# EAGLE board Main Board _Board (EAGLE 9.7.0), part 1 of 3
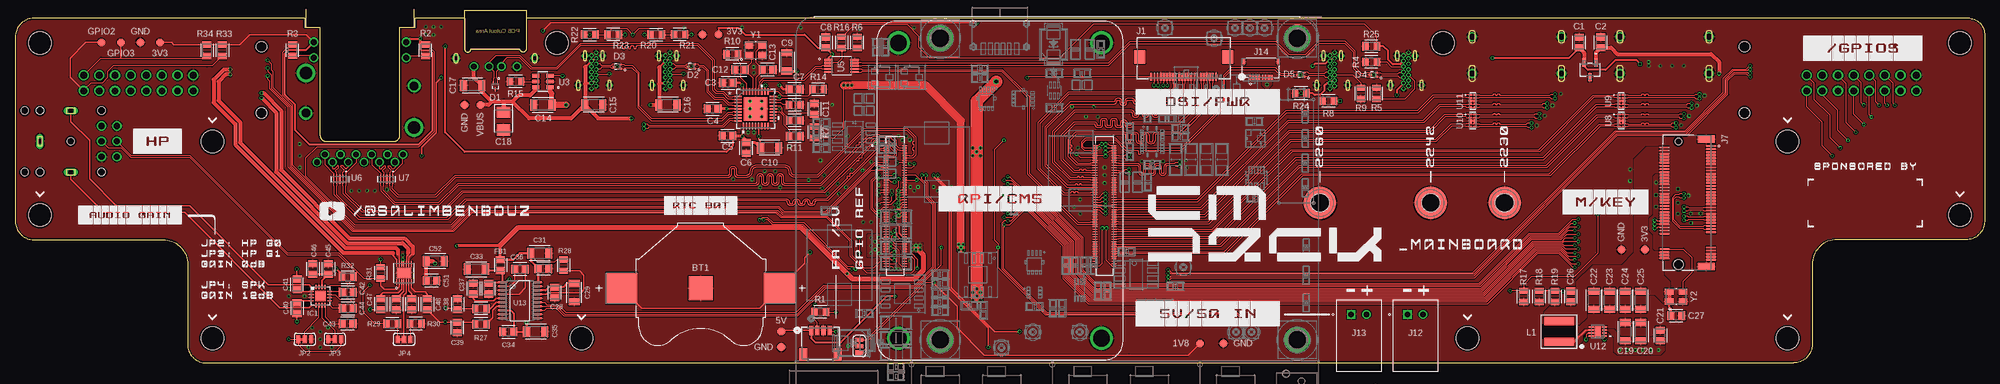
[diagram p0: board, top side]
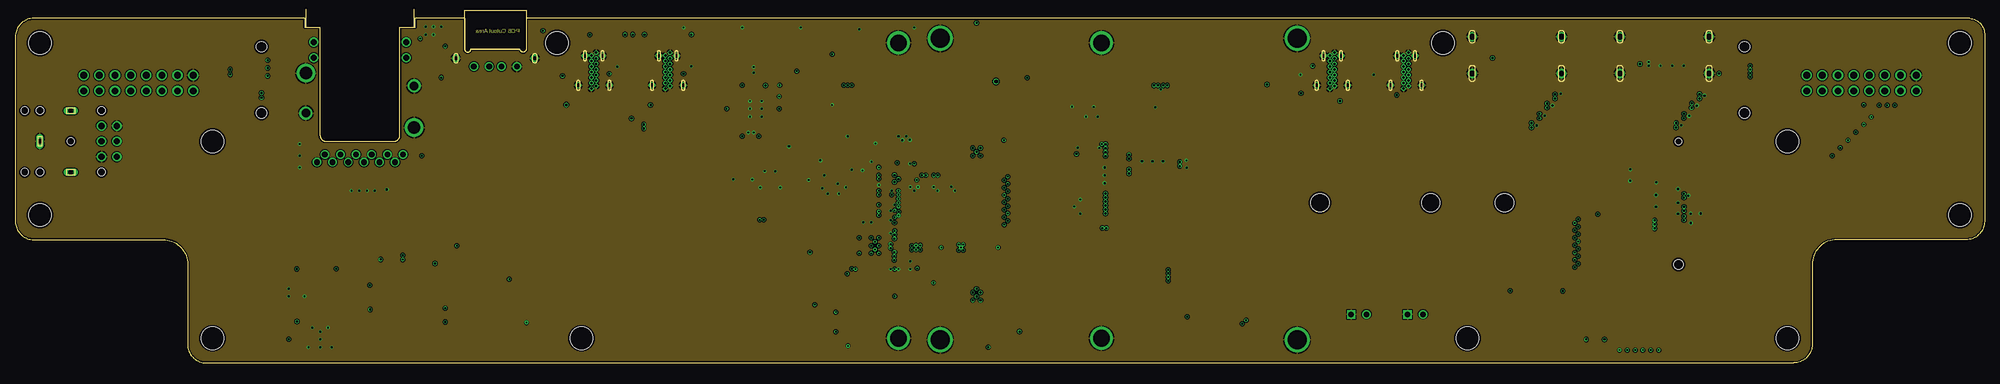
[diagram p1: board, inner layer Route2]
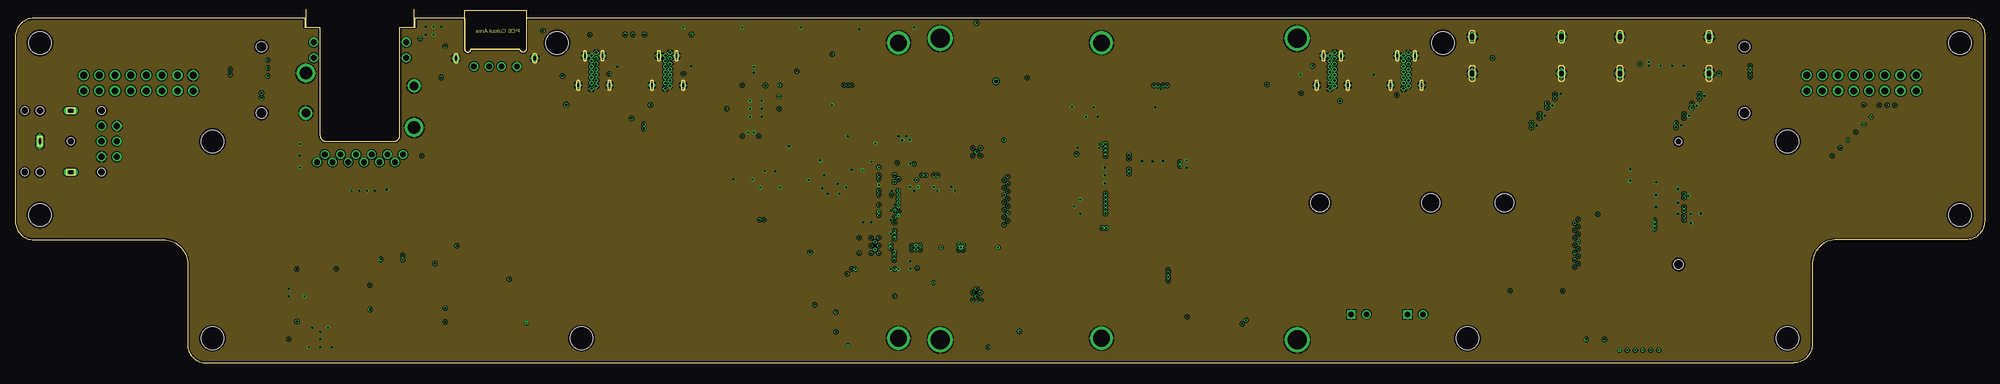
[diagram p2: board, inner layer Route15]
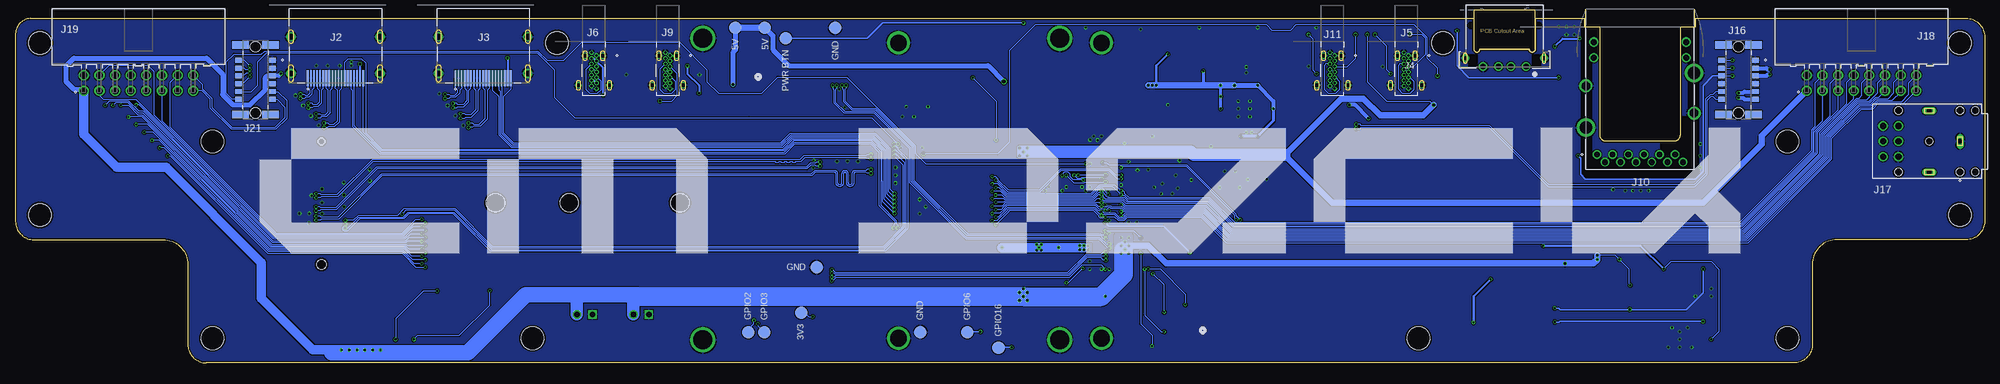
[diagram p3: board, bottom side, seen from below]

Size 320.02 x 56 mm. Coordinates in mm from the lower left corner, seen from the top.
Outline: 3,56 arc90 0,53 0,23 arc90 3,20 24,20 arc-90 28,16 28,3 arc90 31,0 289,0 arc90 292,3 292,16 arc-90 296,20 317,20 arc90 320,23 320,53 arc90 317.63,56 83,56 83,50.98 arc-180 82.03,50.98 74,50.98 arc-180 73.03,50.98 73.03,56 65,56 65,54.5 62.5,54.5 62.5,37 arc-90 61.5,36 50.5,36 arc-90 49.5,37 49.5,54.5 47,54.5 47,56 3,56
Copper layers (1+2*15+16): Top 0.035mm / dielectric 0.11mm / Route2 0.035mm / dielectric 1.2mm / Route15 0.035mm / dielectric 0.11mm / Bottom 0.035mm
Design rules "PCBWay_4L_100um-Track *": minimum track width 0.1mm, minimum drill 0.3mm, track to track 0.1mm, track to pad 0.1mm, pad to pad 0.1mm, via to via 0.1mm, smd to smd 0mil, copper to edge 0.3mm, drill to drill 10mil, minimum pad ring 6mil, minimum via ring 0.1mm, stop-mask expansion 2mil, vias tented up to drill 999mil, thermal gap 0.2mm
Net classes: 1 Audio: width 0.203 mm, clearance 0.178 mm; 2 100 ohm: width 0.178 mm, clearance 0.152 mm; 3 90 ohm: width 0.191 mm, clearance 0.105 mm
Holes 3.7 mm at 32,36 32,4 288,4 288,36 236,4 92,4 4,24 316,24 4,52 316,52 88,52 232,52

## Footprints (pad centres in the part's own frame; a part is rotated, then mirrored left to right if it is on the bottom)
BAT_3002 = smd 3.96 x 3.96: N 0,0 | smd 5.08 x 5.08: P 12.825,0; P1 -12.825,0
CAPC2012X110 = smd 1.165 x 1.465: 1 -0.875,0; 2 0.875,0
CAPC3216X135 = smd 1.165 x 1.815: 1 -1.475,0; 2 1.475,0
CAPMP3528X210N = smd 1.796 x 2.204: 1 -1.46,0; 2 1.46,0
SOTFL35P100X50-3N = smd 0.46 x 0.2: 1 -0.52,0.35; 2 -0.52,-0.35; 3 0.52,0
BEADC2012X105N = smd 1.165 x 1.465: 1 -0.875,0; 2 0.875,0
QFN16 = smd 0.85 x 0.3: 1 -1.475,0.75; 2 -1.475,0.25; 3 -1.475,-0.25; 4 -1.475,-0.75; 9 1.475,-0.75; 10 1.475,-0.25; 11 1.475,0.25; 12 1.475,0.75 | smd 0.3 x 0.85: 5 -0.75,-1.475; 6 -0.25,-1.475; 7 0.25,-1.475; 8 0.75,-1.475; 13 0.75,1.475; 14 0.25,1.475; 15 -0.25,1.475; 16 -0.75,1.475 | smd 1.7 x 1.7: TH 0,0
CONN_FH12-22S-0.5SH(55)_HIR = smd 0.305 x 1.295: 1 -5.25,3.05; 2 -4.75,3.05; 3 -4.25,3.05; 4 -3.75,3.05; 5 -3.25,3.05; 6 -2.75,3.05; 7 -2.25,3.05; 8 -1.75,3.05; 9 -1.25,3.05; 10 -0.75,3.05; 11 -0.25,3.05; 12 0.25,3.05; 13 0.75,3.05; 14 1.25,3.05; 15 1.75,3.05; 16 2.25,3.05; 17 2.75,3.05; 18 3.25,3.05; 19 3.75,3.05; 20 4.25,3.05; 21 4.75,3.05; 22 5.25,3.05 | smd 1.803 x 2.21: 23 -7.15,-0.2; 24 7.15,-0.2
SAMESKY_HD05-19-TH-TR = smd 0.28 x 2.6: 1 4.5,6.72; 2 4,6.72; 3 3.5,6.72; 4 3,6.72; 5 2.5,6.72; 6 2,6.72; 7 1.5,6.72; 8 1,6.72; 9 0.5,6.72; 10 0,6.72; 11 -0.5,6.72; 12 -1,6.72; 13 -1.5,6.72; 14 -2,6.72; 15 -2.5,6.72; 16 -3,6.72; 17 -3.5,6.72; 18 -4,6.72; 19 -4.5,6.72 | drill 0.914 pad 1.524 slot 2.718 rotated 90: SH1 -7.25,5.96; SH2 7.25,5.96 | drill 0.914 pad 1.524 slot 2.108 rotated 90: SH3 -7.25,0; SH4 7.25,0
614104190121 = drill 0.92: 1 -3.5,4.85; 2 -1,4.85; 3 1,4.85; 4 3.5,4.85 | drill 0.635 pad 1.219 slot 1.626 rotated 90: S1 -6.4,3.5; S2 6.4,3.5
SAMESKY_UJ20-C-R-G-TH-2-P14-TR = drill 0.406 pad 0.61: A1 -0.39,-2.45; A4 -0.39,-1.55; A5 -0.39,-0.65; A6 -0.39,0.25; A7 -0.39,1.15; A9 -0.39,2.05; A12 -0.39,2.95; B1 0.39,2.5; B4 0.39,1.6; B5 0.39,0.7; B6 0.39,-0.2; B7 0.39,-1.1; B9 0.39,-2; B12 0.39,-2.9 | drill 0.61 pad 1.016 slot 1.626 rotated 90: SH1 -2.53,2.4; SH2 -1.43,-2.4; SH3 2.53,2.4; SH4 1.43,-2.4
TE_1-2199119-5 = smd 0.3 x 1.55: 1 -9.25,3.525; 2 -9,-4.025; 3 -8.75,3.525; 4 -8.5,-4.025; 5 -8.25,3.525; 6 -8,-4.025; 7 -7.75,3.525; 8 -7.5,-4.025; 9 -7.25,3.525; 10 -7,-4.025; 11 -6.75,3.525; 12 -6.5,-4.025; 13 -6.25,3.525; 14 -6,-4.025; 15 -5.75,3.525; 16 -5.5,-4.025; 17 -5.25,3.525; 18 -5,-4.025; 19 -4.75,3.525; 20 -4.5,-4.025; 21 -4.25,3.525; 22 -4,-4.025; 23 -3.75,3.525; 24 -3.5,-4.025; 25 -3.25,3.525; 26 -3,-4.025; 27 -2.75,3.525; 28 -2.5,-4.025; 29 -2.25,3.525; 30 -2,-4.025; 31 -1.75,3.525; 32 -1.5,-4.025; 33 -1.25,3.525; 34 -1,-4.025; 35 -0.75,3.525; 36 -0.5,-4.025; 37 -0.25,3.525; 38 0,-4.025; 39 0.25,3.525; 40 0.5,-4.025; 41 0.75,3.525; 42 1,-4.025; 43 1.25,3.525; 44 1.5,-4.025; 45 1.75,3.525; 46 2,-4.025; 47 2.25,3.525; 48 2.5,-4.025; 49 2.75,3.525; 50 3,-4.025; 51 3.25,3.525; 52 3.5,-4.025; 53 3.75,3.525; 54 4,-4.025; 55 4.25,3.525; 56 4.5,-4.025; 57 4.75,3.525; 58 5,-4.025; 67 7.25,3.525; 68 7.5,-4.025; 69 7.75,3.525; 70 8,-4.025; 71 8.25,3.525; 72 8.5,-4.025; 73 8.75,3.525; 74 9,-4.025; 75 9.25,3.525 | smd 5.3 x 5.3: 59 0,-30; 60 0,-42; 61 0,-60 | smd 1.2 x 2.75: SH1 -10.35,2.75; SH2 10.35,2.75 | hole 1.1: -10,-1.75 | hole 1.6: 10,-1.75 | hole 3: 0,-30; 0,-42; 0,-60
CONN_SM04B-SRSS-TB_JST = smd 0.66 x 1.549: 1 1.5,-2.099; 2 0.5,-2.099; 3 -0.5,-2.099; 4 -1.5,-2.099 | smd 1.295 x 1.905: 5 -2.8,1.776; 6 2.8,1.776
BEL_L8BE-1G1T-BFH = drill 0.914: 1 6.985,11.125; 2 5.715,12.395; 3 4.445,11.125; 4 3.175,12.395; 5 1.905,11.125; 6 0.635,12.395; 7 -0.635,11.125; 8 -1.905,12.395; 9 -3.175,11.125; 10 -4.445,12.395; 11 -5.715,11.125; 12 -6.985,12.395 | drill 1.016: 13 7.518,-4.572; 14 7.518,-7.112; 15 -7.518,-4.572; 16 -7.518,-7.112 | drill 1.4: S1 -8.788,4.42; S2 8.788,0 | drill 2.03: S3 -8.788,-2.083; S4 8.788,6.756
S2B-XH-A = drill 0.9 square: 1 0,0 | drill 0.9: 2 2.5,0
TE_2328702-8 = smd 0.3 x 0.8: 1 0,0; 2 -0.5,0; 3 -1,0; 4 -1.5,0; 5 -2,0; 6 -2.5,0; 7 -3,0; 8 -3.5,0 | smd 0.4 x 0.8: S1 1,-2.5; S2 -4.5,-2.5
HARWIN_M55-7011242R = smd 0.8 x 1.1: A1 3.175,-2.75; A2 1.905,-2.75; A3 0.635,-2.75; A4 -0.635,-2.75; A5 -1.905,-2.75; A6 -3.175,-2.75; B1 3.175,2.75; B2 1.905,2.75; B3 0.635,2.75; B4 -0.635,2.75; B5 -1.905,2.75; B6 -3.175,2.75 | smd 1.2 x 2.7: SH1 5.67,-2.45; SH2 5.67,2.45; SH3 -5.67,-2.45; SH4 -5.67,2.45 | hole 1.7: -5.385,0; 5.385,0
CUI_SJ-3579AN = drill 0.8 long: 1 -5,0; 2 0,-5; 3 0,5 | drill 1: 4 5,2.5; 5 5,0; 6 5,-2.5; 7 7.5,2.5; 8 7.5,0; 9 7.5,-2.5 | hole 1.2: 5,5; 5,-5; 0,0; -5,5; -7.5,5; -5,-5; -7.5,-5
61201621721 = drill 1.1: 1 8.89,8.805; 2 8.89,6.265; 3 6.35,8.805; 4 6.35,6.265; 5 3.81,8.805; 6 3.81,6.265; 7 1.27,8.805; 8 1.27,6.265; 9 -1.27,8.805; 10 -1.27,6.265; 11 -3.81,8.805; 12 -3.81,6.265; 13 -6.35,8.805; 14 -6.35,6.265; 15 -8.89,8.805; 16 -8.89,6.265
SMT-JUMPER_3_1-NC_TRACE_SILK = smd 0.66 x 1.27: 1 -1.041,0; 2 0,0; 3 1.041,0
WE-XHMI_5030 = smd 4.8 x 1.3: 1 0,1.675; 2 0,-1.675
RESC2012X65 = smd 1.031 x 1.42: 1 -0.919,0; 2 0.919,0
B1,27 = smd 1.27 x 1.27: TP 0,0
MODULE_CM5108064B = smd 0.2 x 0.7: 1 7.3,18.54; 2 7.3,15.46; 3 6.9,18.54; 4 6.9,15.46; 5 6.5,18.54; 6 6.5,15.46; 7 6.1,18.54; 8 6.1,15.46; 9 5.7,18.54; 10 5.7,15.46; 11 5.3,18.54; 12 5.3,15.46; 13 4.9,18.54; 14 4.9,15.46; 15 4.5,18.54; 16 4.5,15.46; 17 4.1,18.54; 18 4.1,15.46; 19 3.7,18.54; 20 3.7,15.46; 21 3.3,18.54; 22 3.3,15.46; 23 2.9,18.54; 24 2.9,15.46; 25 2.5,18.54; 26 2.5,15.46; 27 2.1,18.54; 28 2.1,15.46; 29 1.7,18.54; 30 1.7,15.46; 31 1.3,18.54; 32 1.3,15.46; 33 0.9,18.54; 34 0.9,15.46; 35 0.5,18.54; 36 0.5,15.46; 37 0.1,18.54; 38 0.1,15.46; 39 -0.3,18.54; 40 -0.3,15.46; 41 -0.7,18.54; 42 -0.7,15.46; 43 -1.1,18.54; 44 -1.1,15.46; 45 -1.5,18.54; 46 -1.5,15.46; 47 -1.9,18.54; 48 -1.9,15.46; 49 -2.3,18.54; 50 -2.3,15.46; 51 -2.7,18.54; 52 -2.7,15.46; 53 -3.1,18.54; 54 -3.1,15.46; 55 -3.5,18.54; 56 -3.5,15.46; 57 -3.9,18.54; 58 -3.9,15.46; 59 -4.3,18.54; 60 -4.3,15.46; 61 -4.7,18.54; 62 -4.7,15.46; 63 -5.1,18.54; 64 -5.1,15.46; 65 -5.5,18.54; 66 -5.5,15.46; 67 -5.9,18.54; 68 -5.9,15.46; 69 -6.3,18.54; 70 -6.3,15.46; 71 -6.7,18.54; 72 -6.7,15.46; 73 -7.1,18.54; 74 -7.1,15.46; 75 -7.5,18.54; 76 -7.5,15.46; 77 -7.9,18.54; 78 -7.9,15.46; 79 -8.3,18.54; 80 -8.3,15.46; 81 -8.7,18.54; 82 -8.7,15.46; 83 -9.1,18.54; 84 -9.1,15.46; 85 -9.5,18.54; 86 -9.5,15.46; 87 -9.9,18.54; 88 -9.9,15.46; 89 -10.3,18.54; 90 -10.3,15.46; 91 -10.7,18.54; 92 -10.7,15.46; 93 -11.1,18.54; 94 -11.1,15.46; 95 -11.5,18.54; 96 -11.5,15.46; 97 -11.9,18.54; 98 -11.9,15.46; 99 -12.3,18.54; 100 -12.3,15.46; 101 7.3,-15.46; 102 7.3,-18.54; 103 6.9,-15.46; 104 6.9,-18.54; 105 6.5,-15.46; 106 6.5,-18.54; 107 6.1,-15.46; 108 6.1,-18.54; 109 5.7,-15.46; 110 5.7,-18.54; 111 5.3,-15.46; 112 5.3,-18.54; 113 4.9,-15.46; 114 4.9,-18.54; 115 4.5,-15.46; 116 4.5,-18.54; 117 4.1,-15.46; 118 4.1,-18.54; 119 3.7,-15.46; 120 3.7,-18.54; 121 3.3,-15.46; 122 3.3,-18.54; 123 2.9,-15.46; 124 2.9,-18.54; 125 2.5,-15.46; 126 2.5,-18.54; 127 2.1,-15.46; 128 2.1,-18.54; 129 1.7,-15.46; 130 1.7,-18.54; 131 1.3,-15.46; 132 1.3,-18.54; 133 0.9,-15.46; 134 0.9,-18.54; 135 0.5,-15.46; 136 0.5,-18.54; 137 0.1,-15.46; 138 0.1,-18.54; 139 -0.3,-15.46; 140 -0.3,-18.54; 141 -0.7,-15.46; 142 -0.7,-18.54; 143 -1.1,-15.46; 144 -1.1,-18.54; 145 -1.5,-15.46; 146 -1.5,-18.54; 147 -1.9,-15.46; 148 -1.9,-18.54; 149 -2.3,-15.46; 150 -2.3,-18.54; 151 -2.7,-15.46; 152 -2.7,-18.54; 153 -3.1,-15.46; 154 -3.1,-18.54; 155 -3.5,-15.46; 156 -3.5,-18.54; 157 -3.9,-15.46; 158 -3.9,-18.54; 159 -4.3,-15.46; 160 -4.3,-18.54; 161 -4.7,-15.46; 162 -4.7,-18.54; 163 -5.1,-15.46; 164 -5.1,-18.54; 165 -5.5,-15.46; 166 -5.5,-18.54; 167 -5.9,-15.46; 168 -5.9,-18.54; 169 -6.3,-15.46; 170 -6.3,-18.54; 171 -6.7,-15.46; 172 -6.7,-18.54; 173 -7.1,-15.46; 174 -7.1,-18.54; 175 -7.5,-15.46; 176 -7.5,-18.54; 177 -7.9,-15.46; 178 -7.9,-18.54; 179 -8.3,-15.46; 180 -8.3,-18.54; 181 -8.7,-15.46; 182 -8.7,-18.54; 183 -9.1,-15.46; 184 -9.1,-18.54; 185 -9.5,-15.46; 186 -9.5,-18.54; 187 -9.9,-15.46; 188 -9.9,-18.54; 189 -10.3,-15.46; 190 -10.3,-18.54; 191 -10.7,-15.46; 192 -10.7,-18.54; 193 -11.1,-15.46; 194 -11.1,-18.54; 195 -11.5,-15.46; 196 -11.5,-18.54; 197 -11.9,-15.46; 198 -11.9,-18.54; 199 -12.3,-15.46; 200 -12.3,-18.54 | drill 2.7: SH1 -24,16.5; SH2 24,16.5; SH3 -24,-16.5; SH4 24,-16.5
SOT_42SNGV_RIT = smd 0.559 x 1.321: 1 -0.953,-1.194; 2 0.953,-1.194; 3 0,1.194
SOT95P280X145-6N = smd 1.32 x 0.59: 1 -1.145,0.95; 2 -1.145,0; 3 -1.145,-0.95; 4 1.145,-0.95; 5 1.145,0; 6 1.145,0.95
SQFN36_6X6_MCH = smd 1.067 x 0.254: 1 -2.819,2; 2 -2.819,1.5; 3 -2.819,1; 4 -2.819,0.5; 5 -2.819,0; 6 -2.819,-0.5; 7 -2.819,-1; 8 -2.819,-1.5; 9 -2.819,-2; 19 2.819,-2; 20 2.819,-1.5; 21 2.819,-1; 22 2.819,-0.5; 23 2.819,0; 24 2.819,0.5; 25 2.819,1; 26 2.819,1.5; 27 2.819,2 | smd 0.254 x 1.067: 10 -2,-2.819; 11 -1.5,-2.819; 12 -1,-2.819; 13 -0.5,-2.819; 14 0,-2.819; 15 0.5,-2.819; 16 1,-2.819; 17 1.5,-2.819; 18 2,-2.819; 28 2,2.819; 29 1.5,2.819; 30 1,2.819; 31 0.5,2.819; 32 0,2.819; 33 -0.5,2.819; 34 -1,2.819; 35 -1.5,2.819; 36 -2,2.819 | smd 3.81 x 3.81: 37 0,0
SOP50P490X110-10N = smd 1.5 x 0.28: 1 -2.105,1; 2 -2.105,0.5; 3 -2.105,0; 4 -2.105,-0.5; 5 -2.105,-1; 6 2.105,-1; 7 2.105,-0.5; 8 2.105,0; 9 2.105,0.5; 10 2.105,1
IC_TPD4EUSB30DQAR = smd 0.565 x 0.2: 1 -0.417,1; 2 -0.417,0.5; 4 -0.417,-0.5; 5 -0.417,-1; 6 0.417,-1; 7 0.417,-0.5; 9 0.417,0.5; 10 0.417,1 | smd 0.565 x 0.4: 3 -0.417,0; 8 0.417,0
IC8_AP3441SHE-7B_DIO-M = smd 0.762 x 0.254: 1 -1.067,0.75; 2 -1.067,0.25; 3 -1.067,-0.25; 4 -1.067,-0.75; 5 1.067,-0.75; 6 1.067,-0.25; 7 1.067,0.25; 8 1.067,0.75 | smd 0.991 x 1.803: 9 0,0
PW0020A = smd 1.7 x 0.35: 1 -2.85,2.925; 2 -2.85,2.275; 3 -2.85,1.625; 4 -2.85,0.975; 5 -2.85,0.325; 6 -2.85,-0.325; 7 -2.85,-0.975; 8 -2.85,-1.625; 9 -2.85,-2.275; 10 -2.85,-2.925; 11 2.85,-2.925; 12 2.85,-2.275; 13 2.85,-1.625; 14 2.85,-0.975; 15 2.85,-0.325; 16 2.85,0.325; 17 2.85,0.975; 18 2.85,1.625; 19 2.85,2.275; 20 2.85,2.925
SON40P300X300X80-15N = smd 0.76 x 0.22: 1 -1.485,1.2; 2 -1.485,0.8; 3 -1.485,0.4; 4 -1.485,0; 5 -1.485,-0.4; 6 -1.485,-0.8; 7 -1.485,-1.2; 8 1.485,-1.2; 9 1.485,-0.8; 10 1.485,-0.4; 11 1.485,0; 12 1.485,0.4; 13 1.485,0.8; 14 1.485,1.2 | smd 1.7 x 2.3: 15 0,0
X1203 = smd 2.032 x 2.032 bottom: 3V3_DET -49.615,-32.303; 5V$1 -3.315,-43.003; 5V$2 -3.315,-38.203; AC_DET -52.745,-5.333; CHRG_CTL -55.285,-0.253; GND$1 -42.215,-29.803; GND$2 -52.745,-12.953; GND$7 -3.315,-26.803; PWR_SW -5.015,-34.803; SCL -52.745,-38.353; SDA -52.745,-40.893 | drill 3.048: GND$3 -54.015,-48.303; GND$4 -5.015,-48.303; GND$5 -5.015,9.697; GND$6 -54.015,9.697
WE-XTAL_CFPX-180 = smd 1.4 x 1.2: 1 -1.1,-0.85; 2 1.1,-0.85; 3 1.1,0.85; 4 -1.1,0.85
XTAL_ASEK-32.768KHZ-L-R-T = smd 1 x 1.4: 1 -0.8,1.1; 2 -0.8,-1.1; 3 0.8,-1.1; 4 0.8,1.1

## Placement (x,y rotation side)
BT1  COIN-CELL-SMT-3P-3002-BR2016  [BAT_3002]  111.37,12.13 180 top
C1  0.1uF  [CAPC2012X110]  254.11,52.06 270 top
C2  0.1uF  [CAPC2012X110]  257.63,52.08 270 top
C3  0.1uF  [CAPC2012X110]  115.8,45.52 180 top
C4  0.1uF  [CAPC2012X110]  113.31,41.27 180 top
C5  0.1uF  [CAPC2012X110]  115.72,36.93 180 top
C6  0.1uF  [CAPC2012X110]  118.75,34.92 270 top
C7  0.1uF  [CAPC2012X110]  126.62,44.45 0 top
C8  0.1uF  [CAPC2012X110]  131.72,52.07 90 top
C9  10uF  [CAPC3216X135]  125.38,48.9 90 top
C10  10uF  [CAPC3216X135]  122.56,34.93 0 top
C11  0.1uF  [CAPC2012X110]  129.82,41.27 90 top
C12  27pF  [CAPC2012X110]  117.75,47.62 180 top
C13  27pF  [CAPC2012X110]  122.25,47.62 0 top
C14  10uF  [CAPC3216X135]  85.72,41.91 180 top
C15  10uF  [CAPC3216X135]  93.98,41.91 0 top
C16  10uF  [CAPC3216X135]  106.05,41.91 0 top
C17  10uF  [CAPC3216X135]  74.29,45.09 180 top
C18  100uF  [CAPMP3528X210N]  79.3,39.3 270 top
C19  10uF  [CAPC3216X135]  261.63,5.08 90 top
C20  10uF  [CAPC3216X135]  264.16,5.08 90 top
C21  0.1uF  [CAPC2012X110]  267.33,4.44 90 top
C22  10uF  [CAPC3216X135]  256.54,10.16 270 top
C23  10uF  [CAPC3216X135]  259.08,10.16 270 top
C24  10uF  [CAPC3216X135]  261.62,10.16 270 top
C25  10uF  [CAPC3216X135]  264.16,10.16 270 top
C26  4.7nF  [CAPC2012X110]  252.73,10.79 90 top
C27  0.1uF  [CAPC2012X110]  269.9,7.62 0 top
C28  0.1uF  [CAPC2012X110]  87.64,11.43 270 top
C29  10uF  [CAPC3216X135]  90.81,11.43 270 top
C30  0.1uF  [CAPC2012X110]  85.81,15.26 0 top
C31  10uF  [CAPC3216X135]  85.21,17.8 0 top
C32  0.1uF  [CAPC2012X110]  76.92,12.06 270 top
C33  10uF  [CAPC3216X135]  74.92,15.24 180 top
C34  0.1uF  [CAPC2012X110]  80.1,5.08 180 top
C35  10uF  [CAPC3216X135]  84.55,5.08 0 top
C36  2.2uF  [CAPC2012X110]  82,15.23 0 top
C37  2.2uF  [CAPC2012X110]  74.39,12.06 90 top
C38  2.2nF  [CAPC2012X110]  71.85,9.53 90 top
C39  2.2nF  [CAPC2012X110]  71.84,5.74 270 top
C40  1uF  [CAPC2012X110]  45.76,8.91 90 top
C41  1uF  [CAPC2012X110]  45.77,12.74 270 top
C42  2.2uF  [CAPC2012X110]  54.02,11.47 180 top
C43  2.2uF  [CAPC2012X110]  54,6.37 0 top
C44  1uF  [CAPC2012X110]  54.02,8.9 180 top
C45  0.1uF  [CAPC2012X110]  50.84,15.26 90 top
C46  1uF  [CAPC2012X110]  48.3,15.26 90 top
C47  1uF  [CAPC2012X110]  59.34,9.53 90 top
C48  1uF  [CAPC2012X110]  66.96,9.53 90 top
C49  1uF  [CAPC2012X110]  61.88,9.53 90 top
C50  1uF  [CAPC2012X110]  64.42,9.53 90 top
C51  0.1uF  [CAPC2012X110]  67.63,13.34 0 top
C52  10uF  [CAPC3216X135]  68.23,16.51 0 top
D1  TPD2EUSB30DRTR  [SOTFL35P100X50-3N]  78,44.98 270 top
D2  TPD2EUSB30DRTR  [SOTFL35P100X50-3N]  109.85,48.16 180 top
D3  TPD2EUSB30DRTR  [SOTFL35P100X50-3N]  97.79,48.13 180 top
D4  TPD2EUSB30DRTR  [SOTFL35P100X50-3N]  220.7,46.81 180 top
D5  TPD2EUSB30DRTR  [SOTFL35P100X50-3N]  208.86,46.84 180 top
FB1  FBCHIP-0805(2012-METRIC)  [BEADC2012X105N]  78.83,15.88 90 top
IC1  TPA6132A2  [QFN16]  49.58,10.84 0 top
J1  FH12-22S-0.5SH(55)CONN_FH12-22S-0.5SH(55)_HIR  [CONN_FH12-22S-0.5SH(55)_HIR]  189.86,49.53 180 top
J2  HD05-19-TH-TR  [SAMESKY_HD05-19-TH-TR]  268,53 180 bottom
J3  HD05-19-TH-TR  [SAMESKY_HD05-19-TH-TR]  244,53 180 bottom
J4  614104190121  [614104190121]  78,53 180 bottom
J5  UJ20-C-R-G-TH-2-P14-TR  [SAMESKY_UJ20-C-R-G-TH-2-P14-TR]  94,47.5 180 bottom
J6  UJ20-C-R-G-TH-2-P14-TR  [SAMESKY_UJ20-C-R-G-TH-2-P14-TR]  226,47.5 180 bottom
J7  1-2199119-5  [TE_1-2199119-5]  272,26 270 top
J8  SM04B-SRSS-TBCONN_SM04B-SRSS-TB_JST  [CONN_SM04B-SRSS-TB_JST]  130.82,3.17 180 top
J9  UJ20-C-R-G-TH-2-P14-TR  [SAMESKY_UJ20-C-R-G-TH-2-P14-TR]  214,47.5 180 bottom
J10  L8BE-1G1T-BFH  [BEL_L8BE-1G1T-BFH]  56,45 180 bottom
J11  UJ20-C-R-G-TH-2-P14-TR  [SAMESKY_UJ20-C-R-G-TH-2-P14-TR]  106,47.5 180 bottom
J12  S2B-XH-A  [S2B-XH-A]  226.26,7.88 0 top
J13  S2B-XH-A  [S2B-XH-A]  217.08,7.87 0 top
J14  2328702-8  [TE_2328702-8]  200.66,46.41 180 top
J16  M55-7011242R  [HARWIN_M55-7011242R]  40,46 90 bottom
J17  SJ-3579AN  [CUI_SJ-3579AN]  9,36 180 bottom
J18  61201621721  [61201621721]  20,53 180 bottom
J19  61201621721  [61201621721]  300,53 180 bottom
J21  M55-7011242R  [HARWIN_M55-7011242R]  281,46 90 bottom
JP1  JUMPER-SMT_3_1-NC_TRACE_SILK  [SMT-JUMPER_3_1-NC_TRACE_SILK]  137.16,2.72 90 top
JP2  JUMPER-SMT_3_1-NC_TRACE_SILK  [SMT-JUMPER_3_1-NC_TRACE_SILK]  47.03,3.82 180 top
JP3  JUMPER-SMT_3_1-NC_TRACE_SILK  [SMT-JUMPER_3_1-NC_TRACE_SILK]  51.89,3.82 180 top
JP4  JUMPER-SMT_3_1-NC_TRACE_SILK  [SMT-JUMPER_3_1-NC_TRACE_SILK]  63.16,3.81 180 top
L1  2.2uH  [WE-XHMI_5030]  250.82,5.08 180 top
R1  10K  [RESC2012X65]  130.81,8.26 0 top
R2  470  [RESC2012X65]  66.68,50.8 270 top
R3  470  [RESC2012X65]  45.07,50.82 270 top
R4  5.1K  [RESC2012X65]  220.34,48.89 0 top
R5  5.1K  [RESC2012X65]  221.21,43.79 270 top
R6  10K  [RESC2012X65]  136.81,52.07 270 top
R7  100K  [RESC2012X65]  129.82,37.47 90 top
R8  5.1K  [RESC2012X65]  213.39,42.54 0 top
R9  5.1K  [RESC2012X65]  218.67,43.79 90 top
R10  12K  [RESC2012X65]  116.48,50.16 0 top
R11  100K  [RESC2012X65]  126.64,36.83 0 top
R12  100K  [RESC2012X65]  126.64,39.37 0 top
R13  100K  [RESC2012X65]  126.64,41.91 0 top
R14  100K  [RESC2012X65]  130.46,44.45 0 top
R15  15K  [RESC2012X65]  81.28,45.72 0 top
R16  10K  [RESC2012X65]  134.26,52.07 90 top
R17  100K  [RESC2012X65]  245.11,10.79 270 top
R18  2.2K  [RESC2012X65]  247.65,10.79 270 top
R19  10K  [RESC2012X65]  250.19,10.79 90 top
R20  56K  [RESC2012X65]  104.14,53.33 180 top
R21  56K  [RESC2012X65]  107.95,53.35 0 top
R22  56K  [RESC2012X65]  93.34,53.34 180 top
R23  56K  [RESC2012X65]  97.16,53.34 0 top
R24  2.2K  [RESC2012X65]  208.91,43.81 0 top
R25  2.2K  [RESC2012X65]  220.34,51.43 0 top
R26  470  [RESC2012X65]  75.66,8.81 0 top
R27  470  [RESC2012X65]  75.66,6.27 0 top
R28  10k  [RESC2012X65]  89.07,15.88 90 top
R29  0  [RESC2012X65]  61.25,6.35 180 top
R30  0  [RESC2012X65]  65.06,6.35 0 top
R31  10K  [RESC2012X65]  59.34,14.61 90 top
R32  10K  [RESC2012X65]  54,13.98 180 top
R33  10K  [RESC2012X65]  33.62,50.81 90 top
R34  10K  [RESC2012X65]  31.12,50.81 90 top
TP1  TPB1,27  [B1,27]  124.46,5.08 0 top
TP2  TPB1,27  [B1,27]  114.3,53.34 0 top
TP3  TPB1,27  [B1,27]  192.51,3.17 0 top
TP4  TPB1,27  [B1,27]  124.46,2.54 0 top
TP5  TPB1,27  [B1,27]  111.64,53.34 0 top
TP6  TPB1,27  [B1,27]  196.32,3.17 0 top
TP7  TPB1,27  [B1,27]  264.8,18.41 0 top
TP8  TPB1,27  [B1,27]  260.99,18.41 0 top
TP9  TPB1,27  [B1,27]  13.97,52.07 0 top
TP10  TPB1,27  [B1,27]  17.14,52.07 0 top
TP11  TPB1,27  [B1,27]  75.56,41.91 0 top
TP12  TPB1,27  [B1,27]  73.03,41.91 0 top
TP13  TPB1,27  [B1,27]  23.5,52.07 0 top
TP14  TPB1,27  [B1,27]  20.32,52.07 0 top
U1  CM5108064B  [MODULE_CM5108064B]  160,28 90 top
U2  RT9742SNGVSOT_42SNGV_RIT  [SOT_42SNGV_RIT]  255.89,47.62 180 top
U3  AP22653W6-7  [SOT95P280X145-6N]  85.72,45.72 180 top
U4  USB2514B/M2SQFN36_6X6_MCH  [SQFN36_6X6_MCH]  120.3,41.27 0 top
U5  FSUSB42MUX  [SOP50P490X110-10N]  134.26,48.26 0 top
U6  TPD4EUSB30DQAR  [IC_TPD4EUSB30DQAR]  52.72,29.84 270 top
U7  TPD4EUSB30DQAR  [IC_TPD4EUSB30DQAR]  60.34,29.84 270 top
U8  TPD4EUSB30DQAR  [IC_TPD4EUSB30DQAR]  260.98,39.37 0 top
U9  TPD4EUSB30DQAR  [IC_TPD4EUSB30DQAR]  260.98,42.56 0 top
U10  TPD4EUSB30DQAR  [IC_TPD4EUSB30DQAR]  236.85,39.37 0 top
U11  TPD4EUSB30DQAR  [IC_TPD4EUSB30DQAR]  236.85,42.56 0 top
U12  AP3441SHE-7BIC8_AP3441SHE-7B_DIO-M  [IC8_AP3441SHE-7B_DIO-M]  257.17,5.08 180 top
U13  PCM5100APWRPW0020A  [PW0020A]  82,10.16 0 top
U14  MAX98306ETD+T  [SON40P300X300X80-15N]  63.15,14.61 90 top
U$1  X1203  [X1203]  160,57.75 90 top
Y1  24 MHz  [WE-XTAL_CFPX-180]  120.31,50.8 0 top
Y2  ASEK-32.768KHZ-L-R-T  [XTAL_ASEK-32.768KHZ-L-R-T]  269.88,10.77 90 top

## Library data of the parts
BT1 = Battery_Holder; CATEGORY: Battery Holders; CELL_DIAMETER: 20mm; DATASHEET: https://www.keyelco.com/userAssets/file/M65p9.pdf; DESCRIPTION: Battery Retainer Coin 20.0mm 1 Cell SMD (SMT) Tab; MANUFACTURER: Keystone Electronics; MPN: 3002; OPERATING_TEMPERATURE: NA; PACKAGE_SIZE: 2016; PACKAGE_TYPE: Surface Mount; PART_STATUS: Active; ROHS: Compliant; SERIES: NA; SUBCATEGORY: Coin Cell Holder; TYPE: Retainer
C1-C8 C11-C13 C21 C26-C28 C30 C32 C34 C36-C51 = Capacitor; CATEGORY: Capacitor; PACKAGE_SIZE: 0805; PACKAGE_TYPE: Surface Mount; SUBCATEGORY: Ceramic Capacitors; TYPE: MLCC
C9 C10 C14-C17 C19 C20 C22-C25 C29 C31 C33 C35 C52 = Capacitor; CATEGORY: Capacitor; PACKAGE_SIZE: 1206; PACKAGE_TYPE: Surface Mount; SUBCATEGORY: Ceramic Capacitors; TYPE: MLCC
C18 = Capacitor; CATEGORY: Capacitor; PACKAGE_SIZE: 1411; PACKAGE_TYPE: Surface Mount; SUBCATEGORY: Tantalum Capacitors; TYPE: Polymer Capacitors
D1-D5 = TPD2EUSB30DRTR
FB1 = Filter; CATEGORY: Ferrite Bead; DESCRIPTION: Generic Ferrite Bead 0805 (2012 Metric); PACKAGE_SIZE: 0805; PACKAGE_TYPE: Surface Mount
IC1 = texas; MPN: TPA6132A2RTET; OC_FARNELL: 1697167; OC_NEWARK: 46P3781
J1 = FH12-22S-0.5SH; COPYRIGHT: Copyright (C) 2025 Ultra Librarian. All rights reserved.; MANUFACTURER_NAME: Hirose; MANUFACTURER_PART_NUMBER: FH12-22S-0.5SH(55)
J2 J3 = HD05-19-TH-TR; MANUFACTURER: Same Sky; MAXIMUM_PACKAGE_HEIGHT: 6.32mm; PARTREV: 1.0; STANDARD: Manufacturer Recommendations
J4 = Wurth_Connectors_WR-USB; APPLICATION: USB 2.0; DATASHEET-URL: https://www.we-online.com/redexpert/spec/614104190121?ae; GERDER: Receptacle; INTERFACE-TYPE: Type A; MOUNT: THT; PACKAGING: Tape and Reel & Mylar; PART-NUMBER: 614104190121; PINS: 4pcs; TYPE: Horizontal - Short Type; WORKING-VOLTAGE: 30VAC
J5 J6 J9 J11 = UJ20-C-R-G-TH-2-P14-TR_; MANUFACTURER: Same Sky; MAXIMUM_PACKAGE_HEIGHT: 8.94mm; PARTREV: 1.01; STANDARD: Manufacturer Recommendations
J7 = 1-2199119-5; CHECK_PRICES: https://www.snapeda.com/parts/1-2199119-5/TE+Connectivity+AMP+Connectors/view-part/?ref=eda; COMMENT: 1-2199119-5; DESCRIPTION: M.2 0.5PITCH 3.2H KEY M 15Uinch AU, M.2 Connectors | TE Connectivity 1-2199119-5; DIGIKEY_PART_NUMBER: A115902CT-ND; MF: TE Connectivity; MP: 1-2199119-5; PACKAGE: None; SNAPEDA_LINK: https://www.snapeda.com/parts/1-2199119-5/TE+Connectivity+AMP+Connectors/view-part/?ref=snap
J8 = JST SH 4; COPYRIGHT: Copyright (C) 2024 Ultra Librarian. All rights reserved.; MANUFACTURER_PART_NUMBER: SM04B-SRSS-TB; MFR_NAME: JST
J10 = L8BE-1G1T-BFH; MANUFACTURER: Bel Fuse; MAXIMUM_PACKAGE_HEIGHT: 10.7 mm; PARTREV: A; STANDARD: Manufacturer Recommendations
J12 J13 = Connector; CATEGORY: Connectors; DATASHEET: https://www.jst-mfg.com/product/pdf/eng/eXH.pdf; DESCRIPTION: Connector Header Through Hole- Right Angle 2 position 0.098" (2.50mm); MANUFACTURER: JST Sales America Inc.; MPN: S2B-XH-A-1; OPERATING_TEMPERATURE: -25°C ~ 85°C; PACKAGE_SIZE: NA; PACKAGE_TYPE: Through Hole; PART_STATUS: Active; PITCH: 0.098" (2.50mm); ROHS: Compliant; SERIES: XH; SUBCATEGORY: Rectangular Connectors; TYPE: Male Headers
J14 = 2328702-8; MANUFACTURER: TE Connectivity; MAXIMUM_PACKAGE_HEIGHT: 1.1mm; PARTREV: 5; STANDARD: Manufacturer Recommendations
J16 J21 = M55-7011242R; MANUFACTURER: Harwin; MAXIMUM_PACKAGE_HEIGHT: 8.0mm; PARTREV: 8; STANDARD: Manufacturer Recommendations
J17 = SJ-3579AN; MF: CUI Inc; PARTREV: 1.01; STANDARD: Manufacturer recommendations
J18 J19 = Wurth_Connectors_WR-BHD; CONTACT-RESISTANCE-MAX: 20mOhm; COUNT: 1; DATASHEET-URL: https://www.we-online.com/redexpert/spec/61201621721?ae; GENDER: Male PCB side; IR: 3A; LENGTH: 27.98mm; MOUNT: THT; PACKAGING: Tray; PART-NUMBER: 61201621721; PINS: 16; PITCH: 2.54mm; TYPE: Angled; VERSION: Low Profile; WORKING-VOLTAGE: 250VAC
JP1-JP4 = SparkFun-Jumpers
L1 = Wurth_Power Magnetics_WE-XHMI; DATASHEET-URL: https://www.we-online.com/redexpert/spec/74439334022?ae; FRES: 35MHz; HEIGHT: 3mm; IRP: 10.3A@40K; ISAT: 12.8A@30%; L: 2.2uH; LENGTH: 5.55mm; MOUNT: SMT; PART-NUMBER: 74439334022; RDC-MAX: 14.52mOhm; RDC-TYP: 11.3mOhm; SIZE: 5030; WIDTH: 5.35mm
R1-R34 = Resistor; CATEGORY: Resistors; DESCRIPTION: Chip Resistor 2.00 X 1.25 X 0.65 mm body 0805(2012-METRIC) Package; PACKAGE_SIZE: 0805; PACKAGE_TYPE: Surface Mount
TP1-TP14 = testpad
U1 = CM5108064B; AVAILABILITY: Not in stock; CHECK_PRICES: https://www.snapeda.com/parts/CM5108064B/Raspberry+Pi/view-part/?ref=eda; CONNECTOR: 2 x (10164227-1001A1RLF); DESCRIPTION: Cm5 8Gb 64Gb Wifibt, Bulk |Raspberry-Pi CM5108064B; MF: Raspberry Pi; MP: CM5108064B; PACKAGE: None; PRICE: None; SNAPEDA_LINK: https://www.snapeda.com/parts/CM5108064B/Raspberry+Pi/view-part/?ref=snap
U2 = RT9742SNGV; COPYRIGHT: Copyright (C) 2024 Ultra Librarian. All rights reserved.; MANUFACTURER_PART_NUMBER: RT9742SNGV; MFR_NAME: Richtek Technology
U3 = AP22653W6-7; MANUFACTURER: Diodes Inc.; MAXIMUM_PACKAGE_HEIGHT: 1.45 mm; PARTREV: 2-2; STANDARD: IPC 7351B
U4 = USB2514B/M2; COPYRIGHT: Copyright (C) 2024 Ultra Librarian. All rights reserved.; MANUFACTURER_PART_NUMBER: USB2514B/M2; MFR_NAME: Microchip
U5 = FSUSB42MUX; MANUFACTURER: ON Semiconductor; PARTREV: 1.25; STANDARD: IPC-7351B
U6-U11 = TPD4EUSB30DQAR; MANUFACTURER: Texas Instruments; MAXIMUM_PACKAGE_HEIGHT: 0.55 mm; PARTREV: F; STANDARD: Manufacturer Recommendations
U12 = 2025-09-13_21-13-28_Library; COPYRIGHT: Copyright (C) 2025 Ultra Librarian. All rights reserved.; MANUFACTURER_NAME: Diodes Inc; MANUFACTURER_PART_NUMBER: AP3441SHE-7B
U13 = PCM5100APWR; COPYRIGHT: Copyright (C) 2024 Ultra Librarian. All rights reserved.; MANUFACTURER_PART_NUMBER: PCM5100APWR; MFR_NAME: Texas Instruments; REFDES: RefDes; TYPE: TYPE
U14 = MAX98306ETD_T; AVAILABILITY: Unavailable; DESCRIPTION: Audio Amp Speaker 2-CH Stereo 3.7W Class-D 14-Pin TDFN EP; MF: Maxim Integrated; MP: MAX98306ETD+T; PACKAGE: TDFN-14 Maxim; PRICE: None
U$1 = X1203
Y1 = Wurth_Quartz Crystals &amp; Oscillators_WE-XTAL; C-LOAD: 18pF; DATASHEET-URL: https://www.we-online.com/redexpert/spec/830058124?ae; FREQUENCY: 24 MHz; HEIGHT: 0.8mm; LENGTH: 3.2mm; MOUNT: SMT; OPERATING-TEMPERATURE: -40 °C up to +85 °C; PART-NUMBER: 830058124; SIZE: CFPX-180; STABILITY: 30ppm; TOLERANCE: ±20ppm; WIDTH: 2.5mm
Y2 = ASEK-32.768KHZ-L-R-T; MANUFACTURER: Abracon; MAXIMUM_PACKAGE_HEIGHT: 1.2 mm; PARTREV: 01-11-22; SNAPEDA_PN: ASEK-32.768KHZ-L-R-T; STANDARD: Manufacturer Recommendations

## Nets
5V: C2.2 C14.1 C19.1 C20.1 C21.1 C51.1 C52.1 J8.1 J12.2 J13.2 J14.5 J14.6 J14.7 J14.8 J18.1 J19.1 J21.A3 J21.A4 R20.1 R21.1 R22.1 R23.1 R29.2 R31.2 TP1.TP U1.77 U1.79 U1.81 U1.83 U1.85 U1.87 U2.1 U3.1 U12.3 U14.11 U14.12 U$1.5V$1 U$1.5V$2
!RPIBOOT: J21.B3 U1.93
!SPK_SHDN: J17.8 R31.1 U14.2
AUDIO_L [Audio]: C38.1 C41.1 C47.1 R26.1
AUDIO_R [Audio]: C39.1 C40.1 C48.1 R27.1
AVDD: C32.1 C33.1 C34.1 C35.1 FB1.1 U13.1 U13.8
BT_!DISABLE: J21.B2 U1.91
CAM_GPIO: J1.17 U1.97
CAM_GPIO1: J1.18 U1.100
CC1: U1.94
CC2: U1.96
CM5_1.8V: JP1.1 TP3.TP U1.88 U1.90
CM5_3.3V: C3.1 C4.1 C5.1 C6.1 C7.1 C8.1 C9.1 C10.1 C30.1 C31.1 C45.1 C46.1 FB1.2 IC1.14 J1.22 J10.14 J10.16 JP1.3 JP2.3 JP3.1 R1.2 R7.1 R28.2 R32.2 R33.2 R34.2 TP2.TP TP13.TP U1.84 U1.86 U4.5 U4.10 U4.15 U4.23 U4.27 U4.29 U4.36 U5.1 U13.20 U$1.3V3_DET
CM5_VBAT: BT1.P BT1.P1 U1.76
EEPROM_!WP: J21.B6 U1.20
ETHERNET_!LEDG: R3.1 U1.17
ETHERNET_!LEDY: R2.1 U1.15
ETHERNET_PAIR0_N [100 ohm]: J10.2 U1.10 U7.2 U7.9
ETHERNET_PAIR0_P [100 ohm]: J10.1 U1.12 U7.1 U7.10
ETHERNET_PAIR1_N [100 ohm]: J10.5 U1.6 U7.5 U7.6
ETHERNET_PAIR1_P [100 ohm]: J10.4 U1.4 U7.4 U7.7
ETHERNET_PAIR2_N [100 ohm]: J10.8 U1.9 U6.2 U6.9
ETHERNET_PAIR2_P [100 ohm]: J10.7 U1.11 U6.1 U6.10
ETHERNET_PAIR3_N [100 ohm]: J10.11 U1.5 U6.5 U6.6
ETHERNET_PAIR3_P [100 ohm]: J10.10 U1.3 U6.4 U6.7
ETHERNET_SYNC_OUT: U1.18
FAN_PWM: J8.2 R1.1 U1.19
FAN_TACHO: J8.4 U1.16
FB: C26.2 R18.1 R19.2 U12.1
GND: BT1.N C1.1 C2.1 C3.2 C4.2 C5.2 C6.2 C7.2 C8.2 C9.2 C10.2 C11.2 C12.2 C13.2 C14.2 C15.2 C16.2 C17.2 C18.2 C19.2 C20.2 C21.2 C22.2 C23.2 C24.2 C25.2 C27.2 C28.2 C29.2 C30.2 C31.2 C32.2 C33.2 C34.2 C35.2 C37.2 C38.2 C39.2 C42.1 C43.2 C45.2 C46.2 C49.1 C50.1 C51.2 C52.2 D1.3 D2.3 D3.3 D4.3 D5.3 IC1.2 IC1.3 IC1.10 IC1.15 J1.1 J1.4 J1.7 J1.10 J1.13 J1.16 J1.19 J2.2 J2.5 J2.8 J2.11 J2.17 J2.SH1 J2.SH2 J2.SH3 J2.SH4 J3.2 J3.5 J3.8 J3.11 J3.17 J3.SH1 J3.SH2 J3.SH3 J3.SH4 J4.4 J4.S1 J4.S2 J5.A1 J5.A12 J5.B1 J5.B12 J5.SH1 J5.SH2 J5.SH3 J5.SH4 J6.A1 J6.A12 J6.B1 J6.B12 J6.SH1 J6.SH2 J6.SH3 J6.SH4 J7.1 J7.3 J7.9 J7.15 J7.21 J7.27 J7.33 J7.39 J7.45 J7.51 J7.57 J7.59 J7.60 J7.61 J7.71 J7.73 J7.75 J7.SH1 J7.SH2 J8.3 J9.A1 J9.A12 J9.B1 J9.B12 J9.SH1 J9.SH2 J9.SH3 J9.SH4 J10.S1 J10.S2 J10.S3 J10.S4 J11.A1 J11.A12 J11.B1 J11.B12 J11.SH1 J11.SH2 J11.SH3 J11.SH4 J12.1 J13.1 J14.1 J14.2 J14.3 J14.4 J14.S1 J14.S2 J16.A1 J16.A4 J16.B4 J17.1 J17.4 J17.9 J18.2 J19.2 J21.A1 J21.A2 JP2.1 JP3.3 R4.1 R5.1 R6.1 R8.1 R9.1 R10.1 R11.2 R12.2 R13.2 R14.2 R15.1 R17.2 R18.2 R24.1 R25.1 R30.2 TP4.TP TP5.TP TP6.TP TP8.TP TP12.TP TP14.TP U1.1 U1.2 U1.7 U1.8 U1.13 U1.14 U1.22 U1.23 U1.32 U1.33 U1.42 U1.43 U1.52 U1.53 U1.59 U1.60 U1.65 U1.66 U1.71 U1.74 U1.98 U1.107 U1.108 U1.113 U1.114 U1.119 U1.120 U1.125 U1.126 U1.131 U1.132 U1.137 U1.138 U1.144 U1.150 U1.155 U1.156 U1.161 U1.162 U1.167 U1.168 U1.173 U1.174 U1.179 U1.180 U1.185 U1.186 U1.191 U1.192 U1.197 U1.198 U1.SH1 U1.SH2 U1.SH3 U1.SH4 U2.3 U3.2 U4.37 U5.5 U5.10 U6.3 U6.8 U7.3 U7.8 U8.3 U8.8 U9.3 U9.8 U10.3 U10.8 U11.3 U11.8 U12.4 U12.8 U12.9 U13.3 U13.9 U13.10 U13.11 U13.12 U13.16 U13.19 U14.1 U14.8 U14.15 U$1.GND$1 U$1.GND$2 U$1.GND$3 U$1.GND$4 U$1.GND$5 U$1.GND$6 U$1.GND$7 Y1.2 Y1.4 Y2.2
GPIO2: J18.15 J19.15 J21.A5 R33.1 TP9.TP U1.58 U$1.SDA
GPIO3: J18.16 J19.16 J21.A6 R34.1 TP10.TP U1.56 U$1.SCL
GPIO4: J18.13 J19.13 U1.54
GPIO5: U1.34
GPIO6: U1.30 U$1.AC_DET
GPIO7: J18.4 J19.4 U1.37
GPIO8: J18.3 J19.3 U1.39
GPIO9: J18.5 J19.5 U1.40
GPIO10: J18.8 J19.8 U1.44
GPIO11: J18.6 J19.6 U1.38
GPIO12: U1.31
GPIO13: U1.28
GPIO14: J18.14 J19.14 U1.55
GPIO15: J18.11 J19.11 U1.51
GPIO16: U1.29 U$1.CHRG_CTL
GPIO17: J18.12 J19.12 U1.50
GPIO18: U1.49 U13.13
GPIO19: U1.26 U13.15
GPIO20: U1.27
GPIO21: U1.25 U13.14
GPIO22: J18.7 J19.7 U1.46
GPIO23: J18.10 J19.10 U1.47
GPIO24: U1.45
GPIO25: U1.41
GPIO26: U1.24
GPIO27: J18.9 J19.9 U1.48
GPIO_VREF: JP1.2 U1.78
HDMI0_CEC: J2.13 U1.151
HDMI0_CLK_N [100 ohm]: J2.12 U1.190 U8.5 U8.6
HDMI0_CLK_P [100 ohm]: J2.10 U1.188 U8.4 U8.7
HDMI0_HOTPLUG: J2.19 U1.153
HDMI0_SCL: J2.15 U1.200
HDMI0_SDA: J2.16 U1.199
HDMI0_TX0_N [100 ohm]: J2.9 U1.184 U8.2 U8.9
HDMI0_TX0_P [100 ohm]: J2.7 U1.182 U8.1 U8.10
HDMI0_TX1_N [100 ohm]: J2.6 U1.178 U9.5 U9.6
HDMI0_TX1_P [100 ohm]: J2.4 U1.176 U9.4 U9.7
HDMI0_TX2_N [100 ohm]: J2.3 U1.172 U9.2 U9.9
HDMI0_TX2_P [100 ohm]: J2.1 U1.170 U9.1 U9.10
HDMI1_CEC: J3.13 U1.149
HDMI1_CLK_N [100 ohm]: J3.12 U1.166 U10.5 U10.6
HDMI1_CLK_P [100 ohm]: J3.10 U1.164 U10.4 U10.7
HDMI1_HOTPLUG: J3.19 U1.143
HDMI1_SCL: J3.15 U1.147
HDMI1_SDA: J3.16 U1.145
HDMI1_TX0_N [100 ohm]: J3.9 U1.160 U10.2 U10.9
HDMI1_TX0_P [100 ohm]: J3.7 U1.158 U10.1 U10.10
HDMI1_TX1_N [100 ohm]: J3.6 U1.154 U11.5 U11.6
HDMI1_TX1_P [100 ohm]: J3.4 U1.152 U11.4 U11.7
HDMI1_TX2_N [100 ohm]: J3.3 U1.148 U11.2 U11.9
HDMI1_TX2_P [100 ohm]: J3.1 U1.146 U11.1 U11.10
HDMI_5V: C1.2 J2.18 J3.18 U2.2
HP_AUDIO_L [Audio]: IC1.16 J17.2
HP_AUDIO_R [Audio]: IC1.5 J17.3
HP_EN: IC1.13 J17.5 R32.1
HP_G0: IC1.6 JP2.2
HP_G1: IC1.7 JP3.2
HUB_NRESET: C11.1 R7.2 U4.26
HUB_XTALIN: C12.1 U4.33 Y1.1
HUB_XTALOUT: C13.1 U4.32 Y1.3
LED_!ACTIVITY: J16.B1 U1.21
LED_!PWR: J16.B2 U1.95
M2_3.3V: C22.1 C23.1 C24.1 C25.1 C26.1 C27.1 J7.2 J7.4 J7.12 J7.14 J7.16 J7.18 J7.70 J7.72 J7.74 L1.2 R19.1 TP7.TP Y2.1 Y2.4
MIPI0_C_N [100 ohm]: J1.8 U1.127
MIPI0_C_P [100 ohm]: J1.9 U1.129
MIPI0_D0_N [100 ohm]: J1.2 U1.115
MIPI0_D0_P [100 ohm]: J1.3 U1.117
MIPI0_D1_N [100 ohm]: J1.5 U1.121
MIPI0_D1_P [100 ohm]: J1.6 U1.123
MIPI0_D2_N [100 ohm]: J1.11 U1.133
MIPI0_D2_P [100 ohm]: J1.12 U1.135
MIPI0_D3_N [100 ohm]: J1.14 U1.139
MIPI0_D3_P [100 ohm]: J1.15 U1.141
N$1: J11.A5 R20.2
N$2: J5.A5 R22.2
N$3: R10.2 U4.35
N$4: R11.1 U4.22
N$5: J9.A5 R8.2
N$6: J9.B5 R9.2
N$7: R12.1 U4.24
N$8: R13.1 U4.25
N$9: R14.1 U4.28
N$10: L1.1 U12.6
N$11: J6.A5 R4.2
N$12: J6.B5 R5.2
N$13: J7.68 Y2.3
N$14: R15.2 U3.5
N$15: J10.15 R3.2
N$16: J10.13 R2.2
N$17: J5.B5 R23.2
N$18: J11.B5 R21.2
N$19: R26.2 U13.6
N$20: R27.2 U13.7
N$21: C28.1 C29.1 U13.18
N$22: C36.1 U13.2
N$23: C36.2 U13.4
N$24: C37.1 U13.5
N$25: R28.1 U13.17
N$26: C41.2 IC1.1
N$27: C40.2 IC1.4
N$28: C43.1 IC1.8
N$29: C42.2 IC1.12
N$30: C44.2 IC1.9
N$31: C44.1 IC1.11
N$32: C49.2 U14.4
N$33: C48.2 U14.7
N$34: C47.2 U14.3
N$35: C50.2 U14.6
N$36: JP4.2 U14.5
N$38: JP4.1 R30.1
N$39: JP4.3 R29.1
OUT_VBUS: J6.A4 J6.A9 J6.B4 J6.B9 R16.2 R25.2
OUT_VBUS_2: J9.A4 J9.A9 J9.B4 J9.B9 R24.2
PCIE_!RST: J7.50 U1.109
PCIE_!WAKE: J7.54 U1.104
PCIE_CLK_!REQ: J7.52 U1.102
PCIE_CLK_N [90 ohm]: J7.53 U1.112
PCIE_CLK_P [90 ohm]: J7.55 U1.110
PCIE_PWR_EN: R17.1 U1.106 U12.7
PCIE_RX_N [90 ohm]: J7.43 U1.118
PCIE_RX_P [90 ohm]: J7.41 U1.116
PCIE_TX_N [90 ohm]: J7.49 U1.124
PCIE_TX_P [90 ohm]: J7.47 U1.122
PMIC_ENABLE: J21.B4 U1.99
PWR_BUTTON: J16.B3 U1.92 U$1.PWR_SW
SCL0: J1.20 U1.80
SDA0: J1.21 U1.82
SPK_L_N [Audio]: J16.A2 U14.14
SPK_L_P [Audio]: J16.A3 U14.13
SPK_R_N [Audio]: J16.A5 U14.9
SPK_R_P [Audio]: J16.A6 U14.10
USB3-0-D_N [90 ohm]: U1.136
USB3-0-D_P [90 ohm]: U1.134
USB3-1-D_N [90 ohm]: U1.165 U5.6
USB3-1-D_P [90 ohm]: U1.163 U5.7
USB_HD1_N [90 ohm]: D1.2 J4.2 U4.1
USB_HD1_P [90 ohm]: D1.1 J4.3 U4.2
USB_HD2_N [90 ohm]: D2.2 J11.A7 J11.B7 U4.3
USB_HD2_P [90 ohm]: D2.1 J11.A6 J11.B6 U4.4
USB_HD3_N [90 ohm]: D3.2 J5.A7 J5.B7 U4.6
USB_HD3_P [90 ohm]: D3.1 J5.A6 J5.B6 U4.7
USB_HD4_N [90 ohm]: J16.B5 U4.8
USB_HD4_P [90 ohm]: J16.B6 U4.9
USB_HU_N [90 ohm]: U4.30 U5.4
USB_HU_P [90 ohm]: U4.31 U5.3
USB_MUX_SEL: R6.2 R16.1 U5.2
USB_N [90 ohm]: D5.1 J9.A7 J9.B7 U1.103
USB_OTG_ID: J21.B5 U1.101
USB_P [90 ohm]: D5.2 J9.A6 J9.B6 U1.105
USBH_OUT_N [90 ohm]: D4.1 J6.A7 J6.B7 U5.8
USBH_OUT_P [90 ohm]: D4.2 J6.A6 J6.B6 U5.9
VBUS: C15.1 C16.1 C17.1 C18.1 J4.1 J5.A4 J5.A9 J5.B4 J5.B9 J11.A4 J11.A9 J11.B4 J11.B9 TP11.TP U3.6
VBUS_EN: U1.111 U3.3
WL_!DISABLE: J21.B1 U1.89

## Tracks (layer width: path | path; a pad name or v marks a point on that pad's centre or on a via)
5V  (via drill 0.3, 0.35, 0.4, 0.45, 0.6)
  Top 0.152: R31.2 59.34,16.8 v59.36,16.82 | R22.1 R23.1 96.24,53.57 97.02,54.35 99.32,54.35 v100.33,53.34 101.35,54.36 104.24,54.36 105.06,53.54 R20.1 105.07,53.35 R21.1 | R29.2 58.42,6.35 56.52,8.26 56.52,11.56 v57.58,12.62
  Top 0.203: TP1.TP 124.65,5.27 J8.1
  Top 0.305: J8.1 129.32,4 130,3.33 134.14,3.33 141.6,10.79 v142.88,10.79
  Top 0.406: R22.1
  Top 0.61: C52.1 C51.1 | U2.1 256.84,50.42 C2.2 259.31,51.21 260.35,50.16 275.59,50.16 276.86,48.9 v276.86,46.99
  Top 0.762: C52.1 67.84,16.51 v68.2,16.15
  Top 0.813: U3.1 86.87,44.13 87.2,43.8 C14.1
  Top 1.016: C14.1 v89.53,41.91
  Top 2.032: v159.38,45.72 156.21,42.55 v156.21,34.29 156.21,13.34 v156.21,12.04 v156.21,10.78
  Bottom 0.152: v62.94,17.48 60.02,17.48 v59.36,16.82 57.78,15.24 57.78,12.83 v57.58,12.62 | v89.53,41.91 90.17,42.55 97.16,42.55 100.33,45.72 v100.33,53.34 | v140.34,17.78 140.34,13.34 v142.88,10.79
  Bottom 0.305: v267.03,2.08 268.17,2.08 268.61,1.65
  Bottom 0.61: v276.86,46.99 277.21,46.63 J21.A3 | 228.75,10.63 228.35,11.04 228.33,11.03
  Bottom 0.762: v155.57,33.66 v156.84,33.66 v156.84,34.92 v155.57,34.92 v156.21,34.29
  Bottom 0.813: U$1.5V$2 196.93,53.16 196.93,50.88 194.33,48.28 161.95,48.28 v159.38,45.72 | U$1.5V$1 203,50.87 203.4,50.47 v203.4,45.24 | J19.1 309.14,44.45 310.51,44.45 311.79,45.72 311.79,48.26 310.51,49.53 288.93,49.53 286.33,46.94 286.33,43.57 284.68,41.92 281.9,41.92 279.4,44.42 279.4,45.09 | J21.A3 279.12,46.63 279.4,46.35 279.4,45.09 | J21.A4 279.12,45.37 279.4,45.09 | 113.8,33.79 113.75,33.74
  Bottom 1.016: U$1.5V$2 U$1.5V$1 | v62.94,17.48 v62.94,16.79 63.58,16.15 v68.2,16.15 132.99,16.15 135.89,19.05 v139.06,19.05 | v89.53,41.91 91.24,40.21 98.25,40.21 100.97,42.93 104.57,42.93 113.75,33.74 106.05,26.04 45.72,26.04 36.2,35.56 36.2,36.89 J18.1
  Bottom 1.524: 266.7,1.65 267.21,2.15 271.73,2.15 280.04,10.46 280.04,16.26 295.53,31.75 303.53,31.75 308.89,37.11 J19.1
  Bottom 2.032: J12.2 228.75,10.63 | J13.2 219.58,10.53 | 113.8,33.79 128.5,33.79 129,34.29 v156.21,34.29
  Bottom 2.54: 228.35,11.04 237.09,11.04 246.49,1.65 266.7,1.65 268.61,1.65 | 219.58,10.53 219.33,10.78 219.07,11.03 228.33,11.03
  Bottom 3.048: 139.93,18.19 139.93,14.38 143.53,10.78 v156.21,10.78 219.33,10.78
  other vias: 139.06,20.32 139.06,17.78 139.7,19.68 140.34,19.05 139.7,18.41 140.34,20.32 260.68,2.08 261.95,2.08 263.22,2.08 264.49,2.08 265.76,2.08 156.84,10.16 155.57,10.16 155.57,11.43 156.84,11.43
  pour Top (isolate 0.152): 138.53,17.27 141.35,17.27 141.35,20.85 138.53,20.85
  pour Bottom (isolate 0.152): 138.53,17.27 141.35,17.27 141.35,20.85 138.53,20.85
  pour Top (isolate 0.152): 259.83,4.27 259.84,4.24 259.84,1.92 260.39,1.37 267.29,1.37 267.97,2.05 267.97,4.09 261.09,4.09 261.05,4.1 259.77,5.38 257.96,5.38 257.96,5.28 258.8,5.28 258.83,5.27
  pour Top (isolate 0.152, no thermals): 62.71,16.13 63.2,16.13 63.2,18.06 62.71,18.06
  pour Top (no thermals): 203.1,44.65 203.65,44.65 204.24,45.24 204.24,46.74 202.56,46.74 202.56,45.19
  pour Top: 155.27,9.78 157.15,9.78 157.15,11.99 155.27,11.99
!RPIBOOT  (via drill 0.3, 0.35)
  Top 0.152: U1.93 142.18,16.9 142.39,16.69 v142.82,16.69 | v187.32,13.95 187.68,13.95 187.85,14.12 237.09,14.12 260.2,37.23 271.56,37.23 278.05,43.73 278.05,46 279.29,47.24 281.41,47.24 281.58,47.07 v281.94,47.07
  Bottom 0.152: v142.82,16.69 143.21,16.69 143.59,17.07 145.9,17.07 148.84,14.12 186.79,14.12 186.97,13.95 v187.32,13.95 | J21.B3 282.96,46.63 282.53,47.07 v281.94,47.07
!SPK_SHDN
  Top 0.152: J17.8 18.85,33.65 28.45,33.65 44.3,17.8 52.6,17.8 56.72,13.69 R31.1
  Top 0.203: U14.2 62.35,12.34 61.95,11.94 59.92,11.94 59.34,12.51 R31.1
AUDIO_L  (via drill 0.35)
  Top 0.203: R26.1 72.01,8.81 C38.1 71.61,8.89 v69.85,8.89 | v45.72,15.24 45.74,15.22 45.74,13.64 C41.1 | C47.1 v57.67,8.65 v57.66,8.66
  Bottom 0.203: v69.85,8.89 69.22,8.89 68.99,8.66 v57.66,8.66 48.48,8.66 45.72,11.43 v45.72,15.24
AUDIO_R  (via drill 0.35)
  Top 0.203: R27.1 74.39,6.62 C39.1 69.86,6.62 | C40.1 v45.76,6.74 v45.77,6.73 | v69.85,6.63 69.86,6.62 | C48.1 68.99,6.62 69.86,6.62
  Bottom 0.203: v45.77,6.73 69.01,6.73 69.11,6.63 v69.85,6.63
AVDD  (via drill 0.3)
  Top 0.203: C32.1 77.06,13.08
  Top 0.254: 80.95,8.05 80.97,8.03 | C35.1 | 76.64,15 C33.1
  Top 0.305: U13.1 | 79.16,14.67 FB1.1
  Top 0.356: 77.06,13.08 U13.1 | U13.8 80.47,8.53 80.95,8.05 | 80.97,8.03 C34.1 C35.1 | U13.1 79.16,14.67 | FB1.1 76.64,15
  Top 0.406: U13.1 79.78,13.08 v80.29,13.59 | v83.06,6.55 C35.1
  Bottom 0.406: v80.29,13.59 83.06,10.82 v83.06,6.55
BT_!DISABLE  (via drill 0.3, 0.35)
  Top 0.152: U1.91 141.5,17.34 v142.82,17.34 | v187.32,14.55 187.68,14.55 187.85,14.37 236.98,14.37 260.09,37.49 271.45,37.49 277.8,43.83 277.8,46.11 279.19,47.49 281.41,47.49 281.58,47.67 v281.94,47.67
  Bottom 0.152: v142.82,17.34 143.14,17.34 143.15,17.33 145.99,17.33 148.95,14.37 186.79,14.37 186.97,14.55 v187.32,14.55 | J21.B2 282.81,47.91 282.57,47.67 v281.94,47.67
CAM_GPIO  (via drill 0.35)
  Top 0.152: v187.19,45.09 187.19,45.52 187.11,45.59 J1.17 | v142.24,18.64 142.84,18.64 143.3,18.17 143.3,16.45 142.95,16.1 U1.97
  Bottom 0.152: v187.19,45.09 187.19,44.59 187,44.4 187,42.23 185.38,40.62 180.52,40.62 174.77,34.87 174.77,29.37 165.6,20.2 143.97,20.2 142.41,18.64 v142.24,18.64
CAM_GPIO1  (via drill 0.35)
  Top 0.152: J1.18 186.61,45.57 186.53,45.49 v186.53,45.09 | U1.100 144.07,15.7 143.56,16.2 143.56,18.27 142.54,19.29 v142.24,19.29
  Bottom 0.152: v186.53,45.09 186.53,44.6 186.74,44.4 186.74,42.34 185.28,40.87 180.41,40.87 174.52,34.98 174.52,29.48 165.49,20.45 143.85,20.45 142.7,19.3 142.25,19.3 v142.24,19.29
CM5_1.8V  (via drill 0.3)
  Top 0.152: v146.58,15.34 146.58,16.87 145.75,17.7 U1.90 U1.88 | JP1.1 137.57,1.68 138.43,2.54 138.43,3.53 147.93,13.03 v149.2,13.03
  Top 0.203: v149.2,13.03 153.03,9.2 153.03,5.71 157.48,1.27 180.97,1.27 190.61,1.27 TP3.TP
  Bottom 0.152: v146.58,15.34 148.9,13.03 v149.2,13.03
CM5_3.3V  (via drill 0.3, 0.35, 0.4)
  Top 0.152: J1.22 164.59,46.48 v164.47,46.35 | v160.66,36.2 159.06,34.59 159.06,20.02 159.69,19.38 v159.69,18.75 159.69,15.49 167.43,7.75 190.17,7.75 v190.42,7.49 | R7.1 133.06,36.55 134.62,38.1 v134.62,45.09 | JP3.1 52.93,2.77 52.07,1.91 46.99,1.91 45.99,2.91 JP2.3 44.46,3.82 v44.45,3.81 | JP1.3 138.3,3.76 150.5,15.95 v150.5,18.75 | R28.2 88.05,16.79 87.59,16.34 84.86,16.34 83.82,17.37 | R1.2 v133.35,8.26
  Top 0.203: J10.16 47.25,53.34 38.1,53.34 36.49,51.73 R33.2 R34.2 31.1,51.71 25.76,51.71 25.4,52.07 TP13.TP | TP2.TP 114.3,54.44
  Top 0.254: U4.36 118.3,44.9 v118.11,45.09 | U4.29 121.8,44.96 v121.92,45.09 | v115.57,41.27 U4.5 | v118.11,36.83 v118.12,36.84 118.12,37.64 118.3,37.82 U4.10 | U4.15 v120.8,36.83 120.8,36.32 121.07,36.04 C10.1 | U4.23 v124.16,41.27 | U4.27 v124.15,43.27 v124.16,43.28
  Top 0.305: C45.1 49.83,13.36 IC1.14 | U5.1 132.16,49.61 v132.72,50.16 131.72,51.16 C8.1 130.41,51.2 128.27,53.34 118.57,53.34 117.47,54.44 114.3,54.44 | J10.16 47.24,50.87 44.45,50.87 43.8,50.21 43.8,43.6 45.48,41.92 45.48,37.81 47.81,35.47 65.49,35.47 67.71,37.7 67.71,50.43 67.31,50.83 65.99,50.83 65.72,51.1 65.72,52.34 65.8,52.42 v65.8,52.7 64.11,52.7 J10.14 | C5.1 116.6,35.32 115.57,34.29 73.03,34.29 69.85,37.47 v69.85,51.44
  Top 0.406: 78.74,16.84 FB1.2 80.89,16.75 81.94,17.8 C31.1 83.82,17.8 83.82,17.37 83.82,16.51 84.94,15.39 C30.1 84.94,13.17 U13.20 | R32.2 53.09,14.38 v52.17,15.29 51.26,14.38 C45.1 C46.1 | v118.11,45.09 117.68,45.52 C3.1 | v126.97,47.42 | C7.1 124.82,44.45 v124.18,45.09 | v153.67,18.75 153.67,18.69 v153.29,18.31
  Top 0.508: 78.74,16.84 78.74,19.05 v71.75,19.05 | C9.1 v126.97,47.42 | v115.57,41.27 C4.1 | C5.1 116.7,36.83 v118.11,36.83 118.75,36.19 C6.1 120.2,35.8 C10.1 | v153.29,19.23 v153.29,18.31 v154.05,18.31 v154.05,19.23
  Top 0.813: 146.38,18.75 147.52,17.6 147.52,15.04 146.07,13.59 136.07,13.59 v135.15,14.5 127.74,21.92 81.61,21.92 78.74,19.05
  Top 1.27: v153.67,18.75 153.67,39.37 147.96,45.09 v135.89,45.09 v135.25,45.09 v134.62,45.09
  Bottom 0.152: U$1.3V3_DET 191.7,8.13 191.06,7.49 v190.42,7.49 | v164.47,46.35 160.66,42.55 v160.66,36.2 | v52.17,15.29 50.95,16.51 44.45,16.51 43.18,15.24 43.18,5.08 v44.45,3.81 | v133.35,8.26 133.35,12.7 v135.15,14.5
  Bottom 0.254: 124.16,45.06 v124.18,45.09
  Bottom 0.305: v69.85,51.44 68.58,52.7 v65.8,52.7
  Bottom 0.406: v71.75,19.05 55.93,19.05 v52.17,15.29 | v126.97,47.42 127,47.4 | v134.62,45.09 134.62,48.26 v132.72,50.16
  Bottom 0.508: 127,47.4 127,45.09 | v115.57,41.27 115.57,39.37 v118.11,36.83 v120.8,36.83 | v124.16,41.27 v124.16,43.28 124.16,45.06
  Bottom 0.61: v118.11,45.09 115.57,42.55 v115.57,41.27
  Bottom 0.813: v121.92,45.09 v118.11,45.09
  Bottom 1.016: v121.92,45.09 v124.18,45.09 127,45.09 v134.62,45.09 v135.89,45.09
  Bottom 1.524: 146.38,18.75 v150.5,18.75 v153.67,18.75 v159.69,18.75
  other vias: 145.67,19.05 145.67,18.39 147.07,18.39 147.07,19.08 146.35,18.39 146.35,19.08
  pour Top: 144.27,18.08 147.44,18.08 147.44,19.38 144.27,19.38
  pour Bottom (isolate 0.305, no thermals): 145.18,18.14 147.37,18.14 147.37,19.35 145.18,19.35
CM5_VBAT  (via drill 0.35)
  Top 0.203: BT1.P1 124.21,12.7 124.79,12.7 128.27,16.18 128.27,17.09 v129.13,17.96 | BT1.P1 | BT1.P 101.78,8.89 120.65,8.89 120.96,8.89 BT1.P1 | v142.88,22.76 143.06,22.76 143.6,22.21 143.6,21.1 144.21,20.5 U1.76
  Bottom 0.203: v142.88,22.76 142.34,22.23 133.4,22.23 v129.13,17.96
EEPROM_!WP  (via drill 0.3)
  Top 0.152: v146.05,32.38 146.05,32.05 145.69,31.7 U1.20
  Bottom 0.152: v146.05,32.38 172.09,32.38 173.76,34.06 173.76,35.31 184.89,46.43 196.14,46.43 198.75,43.81 205.74,43.81 207.65,45.72 207.65,47.62 212.09,52.07 227.97,52.07 230.9,49.14 233.56,49.14 235.09,50.67 279.53,50.67 280.04,50.16 284.49,50.16 285.75,48.9 285.75,43.81 284.76,42.83 J21.B6
ETHERNET_!LEDG
  Top 0.152: R3.1 44.75,51.74 43.47,50.45 43.47,43.47 45.11,41.83 45.11,32.08 55.12,22.07 70.84,22.07 73.86,25.09 124.03,25.09 124.81,24.31 131.75,24.31 139.62,32.18 140.51,32.18 140.59,32.1 U1.17
ETHERNET_!LEDY
  Top 0.152: R2.1 66.89,51.72 68.12,50.48 68.12,37.64 65.58,35.1 49.02,35.1 47.21,33.29 47.21,30.33 55.22,22.32 70.73,22.32 73.76,25.35 124.13,25.35 124.92,24.56 131.65,24.56 139.59,32.5 U1.15
ETHERNET_PAIR0_N
  Top 0.178: J10.2 61.72,31.77 61.51,31.56 arc-90 61.28,31.56 60.85,31.99 arc90 60.62,31.99 arc90 60.62,31.76 61.04,31.33 arc-90 61.04,31.1 60.84,30.89 U7.2 U7.9 60.84,28.79 60.92,28.7 60.92,28.15 62.14,26.92 68.33,26.92 71.5,30.1 115.75,30.1 arc90 116.32,30.67 116.32,31.32 arc-90 116.56,31.56 116.66,31.56 arc-90 116.9,31.32 116.9,30.67 arc90 117.47,30.1 118.69,30.1 arc90 119.71,31.11 arc-90 120.34,31.75 125.09,31.75 arc-90 125.73,31.11 arc90 126.69,30.15 130.43,30.15 137.97,37.69 144.91,37.69 146.05,36.55 146.05,36.1 arc-90 145.93,35.98 arc90 145.81,35.86 145.81,35.62 arc90 145.93,35.5 arc-90 146.05,35.38 146.05,35.13 arc-90 145.93,35.01 arc90 145.81,34.89 145.81,34.65 arc90 145.93,34.53 arc-90 146.05,34.41 146.05,33.94 145.77,33.66 145.25,33.66 145.25,33.7 U1.10
ETHERNET_PAIR0_P
  Top 0.178: J10.1 62.98,32.45 61.34,30.8 U7.1 U7.10 61.34,28.79 61.25,28.7 61.25,28.28 62.28,27.25 68.19,27.25 71.36,30.43 115.75,30.43 arc90 115.99,30.67 115.99,31.32 arc-90 116.56,31.89 116.66,31.89 arc-90 117.23,31.32 117.23,30.67 arc90 117.47,30.43 118.69,30.43 arc90 119.38,31.11 arc-90 120.34,32.08 125.09,32.08 arc-90 126.06,31.11 arc90 126.69,30.48 130.29,30.48 137.84,38.02 145.04,38.02 146.38,36.69 146.38,33.81 145.91,33.34 145.25,33.34 145.25,33.3 U1.12
ETHERNET_PAIR1_N
  Top 0.178: J10.5 57.91,32.21 59.34,30.78 U7.5 U7.6 59.34,28.79 59.42,28.7 59.42,27.89 61.63,25.68 68.89,25.68 72.01,28.8 120.22,28.8 arc90 120.81,29.4 120.81,30.18 arc-90 121.03,30.39 arc-90 121.27,30.15 121.27,29.38 arc90 121.84,28.8 arc90 122.42,29.38 122.42,30.15 arc-90 122.66,30.39 arc-90 122.9,30.15 122.9,29.38 arc90 123.47,28.8 arc90 124.04,29.38 124.04,30.15 arc-90 124.28,30.39 arc-90 124.52,30.15 124.52,29.38 arc90 125.09,28.8 130.91,28.8 138.66,36.55 138.73,36.55 138.73,36.56 139.09,36.56 139.1,36.55 139.12,36.55 139.32,36.76 140.23,36.76 140.43,36.55 142.26,36.55 142.89,35.93 142.89,35.16 143.51,34.53 143.8,34.53 143.83,34.5 U1.6
ETHERNET_PAIR1_P
  Top 0.178: J10.4 59.17,31.58 59.24,31.52 arc90 59.47,31.52 59.9,31.95 arc-90 60.13,31.95 arc-90 60.13,31.71 59.7,31.28 arc90 59.7,31.1 59.84,30.97 U7.4 U7.7 59.84,28.79 59.75,28.7 59.75,28.03 61.77,26.01 68.75,26.01 71.87,29.13 120.22,29.13 arc90 120.48,29.4 120.48,30.18 arc-90 121.03,30.72 arc-90 121.6,30.15 121.6,29.38 arc90 121.84,29.13 arc90 122.08,29.38 122.08,30.15 arc-90 122.66,30.72 arc-90 123.23,30.15 123.23,29.38 arc90 123.47,29.13 arc90 123.71,29.38 123.71,30.15 arc-90 124.28,30.72 arc-90 124.85,30.15 124.85,29.38 arc90 125.09,29.13 130.78,29.13 136.6,34.95 arc90 136.6,35.12 arc-90 136.6,35.29 136.66,35.36 arc-90 136.83,35.36 arc90 137,35.36 137.06,35.42 arc90 137.06,35.59 arc-90 137.06,35.76 137.13,35.83 arc-90 137.3,35.83 arc90 137.47,35.83 138.53,36.88 138.59,36.88 138.59,36.89 138.99,36.89 139.18,37.09 140.37,37.09 140.57,36.88 142.4,36.88 143.22,36.06 143.22,35.3 143.65,34.87 143.8,34.87 143.83,34.9 U1.4
ETHERNET_PAIR2_N
  Top 0.178: J10.8 54.09,31.87 53.85,31.63 arc-90 53.62,31.63 53.19,32.06 arc90 52.96,32.06 arc90 52.96,31.82 53.39,31.39 arc-90 53.39,31.16 53.22,30.99 U6.2 U6.9 53.22,28.79 53.3,28.7 53.3,27.51 56.37,24.44 69.55,24.44 72.72,27.61 131.52,27.61 136.78,32.86 arc-90 136.91,32.86 arc90 137.05,32.86 137.15,32.96 arc90 137.15,33.1 arc-90 137.15,33.24 137.24,33.33 arc-90 137.38,33.33 arc90 137.52,33.33 137.61,33.43 arc90 137.61,33.56 arc-90 137.61,33.7 139.34,35.43 139.34,35.84 139.59,36.09 139.96,36.09 140.22,35.84 140.22,35.66 141.96,35.66 142.23,35.4 142.23,34.88 142.88,34.24 142.88,33.84 142.7,33.66 142.2,33.66 142.17,33.7 U1.9
ETHERNET_PAIR2_P
  Top 0.178: J10.7 55.37,32.48 53.72,30.83 U6.1 U6.10 53.72,28.79 53.63,28.7 53.63,27.65 56.51,24.77 69.41,24.77 72.58,27.94 131.38,27.94 139.01,35.56 139.01,35.98 139.46,36.42 140.09,36.42 140.53,35.99 142.1,35.99 142.56,35.54 142.56,35.02 143.21,34.38 143.21,33.71 142.83,33.34 142.2,33.34 142.17,33.3 U1.11
ETHERNET_PAIR3_N
  Top 0.178: J10.11 50.28,32.25 51.69,30.85 | U1.5 140.75,34.5 140.72,34.53 140.22,34.53 132,26.31 130.16,26.31 arc90 129.93,26.09 arc-90 129.38,25.54 129.34,25.54 arc-90 128.79,26.09 arc90 128.57,26.31 128.53,26.31 arc90 128.31,26.09 arc-90 127.76,25.54 127.72,25.54 arc-90 127.17,26.09 arc90 126.94,26.31 126.91,26.31 arc90 126.68,26.09 arc-90 126.13,25.54 126.02,25.54 arc-90 125.46,26.09 arc90 125.24,26.31 73.28,26.31 70.26,23.29 55.79,23.29 51.8,27.29 51.8,28.7 51.72,28.79 U6.6 U6.5 51.72,30.82 51.69,30.85 | 51.69,30.85
ETHERNET_PAIR3_P
  Top 0.178: U1.3 140.75,34.9 140.72,34.87 140.09,34.87 136.06,30.84 arc-90 135.89,30.84 arc90 135.72,30.84 135.66,30.78 arc90 135.66,30.61 arc-90 135.66,30.44 135.6,30.37 arc-90 135.43,30.37 arc90 135.26,30.37 135.19,30.31 arc90 135.19,30.14 arc-90 135.19,29.97 131.87,26.64 130.16,26.64 arc90 129.6,26.09 arc-90 129.38,25.87 129.34,25.87 arc-90 129.12,26.09 arc90 128.57,26.64 128.53,26.64 arc90 127.98,26.09 arc-90 127.76,25.87 127.72,25.87 arc-90 127.5,26.09 arc90 126.94,26.64 126.91,26.64 arc90 126.35,26.09 arc-90 126.13,25.87 126.02,25.87 arc-90 125.79,26.09 arc90 125.24,26.64 73.14,26.64 70.12,23.62 55.93,23.62 52.13,27.42 52.13,28.7 52.22,28.79 U6.7 U6.4 52.22,30.94 52.1,31.06 arc-90 52.1,31.3 52.53,31.73 arc90 52.53,31.96 arc90 52.29,31.96 51.86,31.53 arc-90 51.63,31.53 51.55,31.61 J10.10
FAN_PWM  (via drill 0.3)
  Top 0.152: J8.2 130.32,6.56 129.89,6.99 R1.1 v129.9,9.47 | U1.19 140.38,31.7 v140.34,31.75 | v121.62,23.23 122.28,23.23 122.96,22.56 127.99,22.56 135.27,15.28 v135.89,15.28
  Bottom 0.152: v140.34,31.75 140.16,31.93 129.77,31.93 121.94,24.11 121.94,23.56 v121.62,23.23 | v135.89,15.28 133.99,15.28 129.9,11.19 v129.9,9.47
FAN_TACHO  (via drill 0.3)